# EAGLE board cansat (EAGLE 7.3.0)
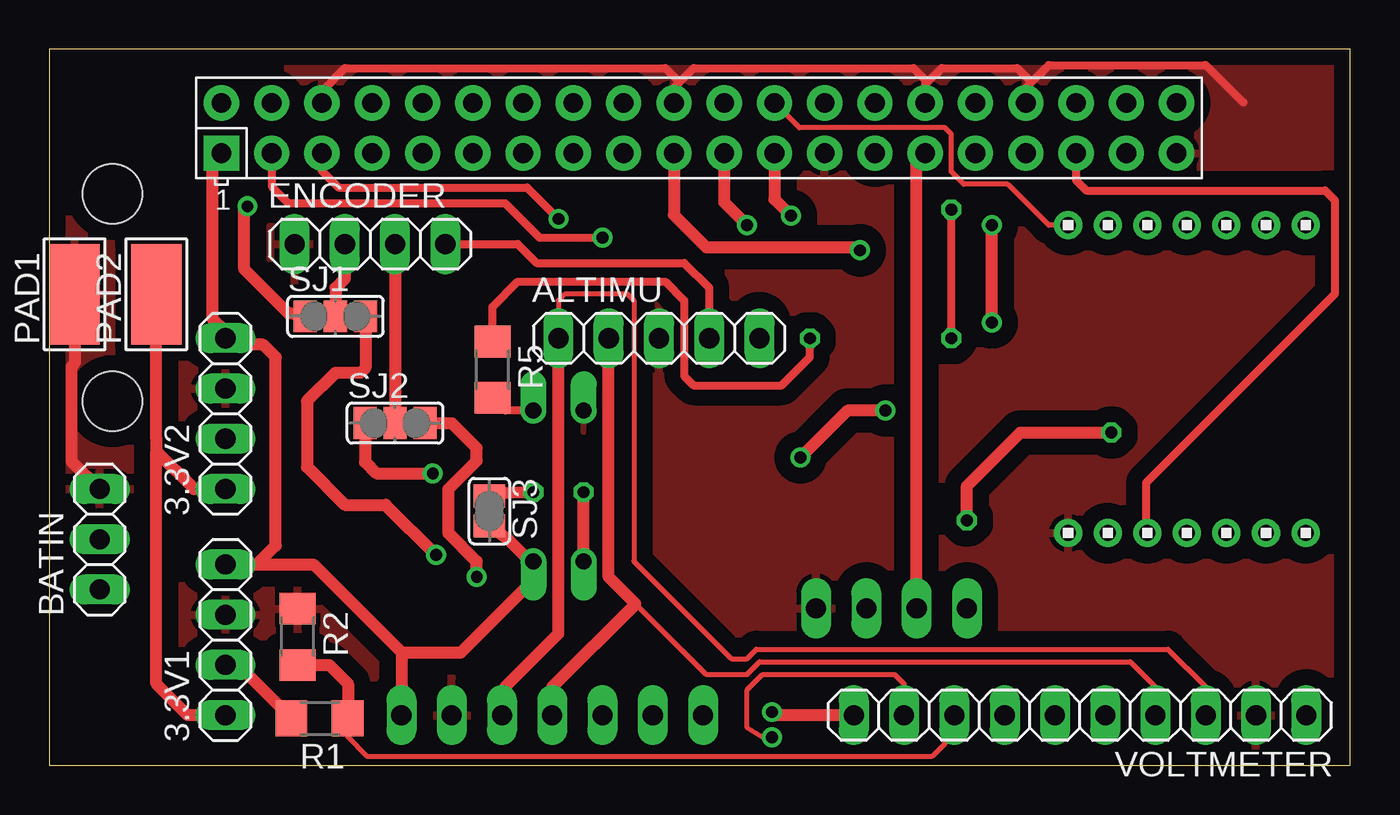
[diagram p0: board, top side]
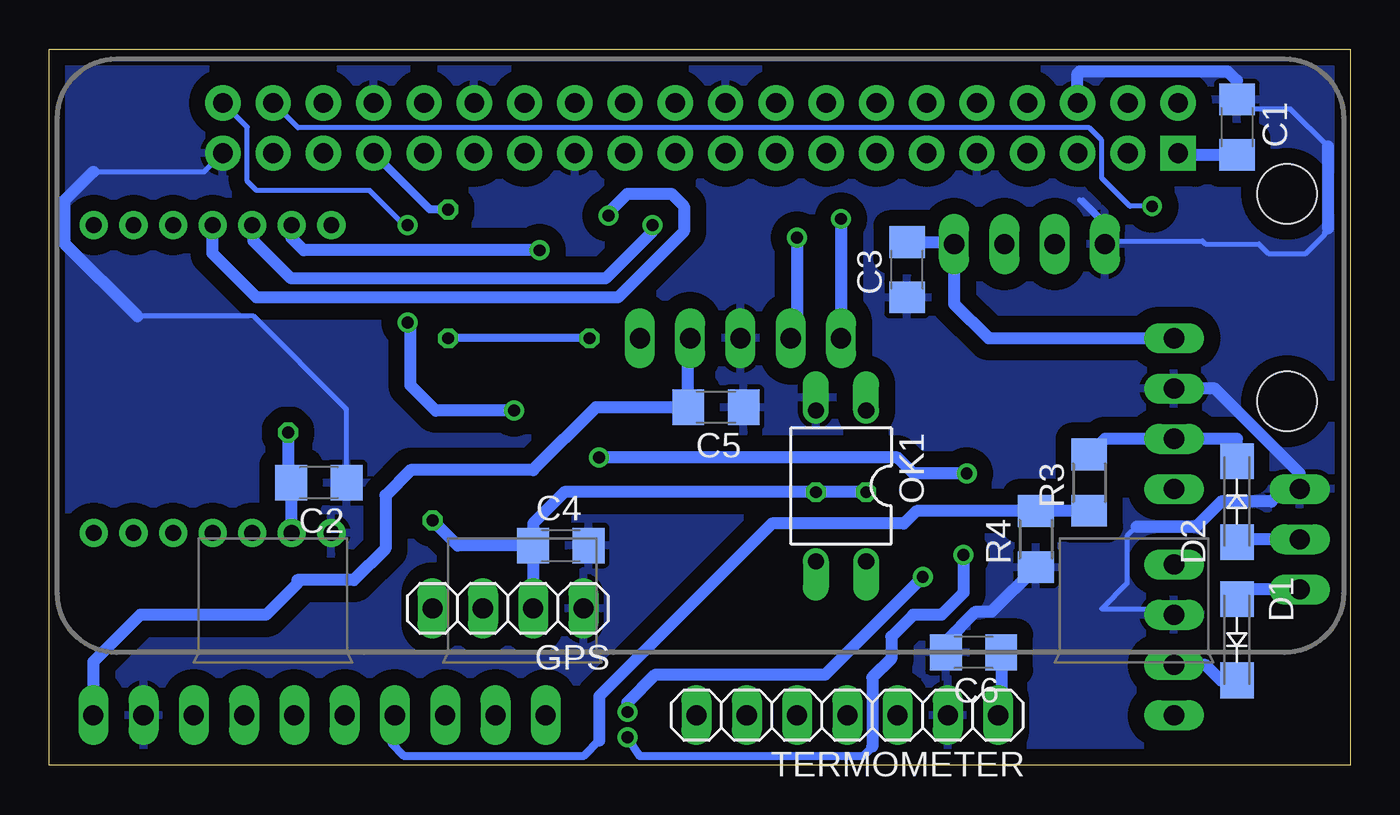
[diagram p1: board, bottom side, seen from below]

Size 65.71 x 36.19 mm. Coordinates in mm from the lower left corner, seen from the top.
Outline: 0,0 65.71,0 65.71,36.19 0,36.19 0,0
Copper layers (1*16): Top 0.035mm / dielectric 1.5mm / Bottom 0.035mm
Design rules "default *": minimum track width 10mil, minimum drill 19mil, track to track 8mil, track to pad 8mil, pad to pad 8mil, via to via 8mil, smd to smd 8mil, copper to edge 8mil, drill to drill 8mil, minimum pad ring 10mil, minimum via ring 8mil, stop-mask expansion 4mil, vias tented up to drill 0mil, thermal gap 10mil
Holes 3 mm at 3.17,18.41 3.17,28.89

## Footprints (pad centres in the part's own frame; a part is rotated, then mirrored left to right if it is on the bottom)
1X04 = drill 1.016 long: 1 -3.81,0; 2 -1.27,0; 3 1.27,0; 4 3.81,0
1X05 = drill 1.016 long: 1 -5.08,0; 2 -2.54,0; 3 0,0; 4 2.54,0; 5 5.08,0
1X03 = drill 1.016 long: 1 -2.54,0; 2 0,0; 3 2.54,0
C1206 = smd 1.6 x 1.8: 1 -1.4,0; 2 1.4,0
SMA-DO214AC = smd 1.8 x 1.7: A -2.05,0; K 2.05,0
DIL04 = drill 0.813 offset: 1 -1.27,-3.81; 2 1.27,-3.81; 3 1.27,3.81; 4 -1.27,3.81
5-2,5 = smd 2.54 x 5.08: 1 0,0
R1206 = smd 1.6 x 1.803: 1 -1.422,0; 2 1.422,0
1X7 = drill 0.8 pad 1.422: 1 -6,0; 2 -4,0; 3 -2,0; 4 0,0; 5 2,0; 6 4,0; 7 6,0
RASPBERRYPI_BASTELSTUBE_V13_RASPI_BOARD_B+_FULL = drill 1 pad 1.778 square: 1 8.37,25.23 | drill 1 pad 1.778: 2 8.37,27.77; 3 10.91,25.23; 4 10.91,27.77; 5 13.45,25.23; 6 13.45,27.77; 7 15.99,25.23; 8 15.99,27.77; 9 18.53,25.23; 10 18.53,27.77; 11 21.07,25.23; 12 21.07,27.77; 13 23.61,25.23; 14 23.61,27.77; 15 26.15,25.23; 16 26.15,27.77; 17 28.69,25.23; 18 28.69,27.77; 19 31.23,25.23; 20 31.23,27.77; 21 33.77,25.23; 22 33.77,27.77; 23 36.31,25.23; 24 36.31,27.77; 25 38.85,25.23; 26 38.85,27.77; 27 41.39,25.23; 28 41.39,27.77; 29 43.93,25.23; 30 43.93,27.77; 31 46.47,25.23; 32 46.47,27.77; 33 49.01,25.23; 34 49.01,27.77; 35 51.55,25.23; 36 51.55,27.77; 37 54.09,25.23; 38 54.09,27.77; 39 56.63,25.23; 40 56.63,27.77
SJ_2 = smd 1.168 x 1.6: 1 -1.524,0; 2 0,0; 3 1.524,0
SJ = smd 1.168 x 1.6: 1 -0.762,0; 2 0.762,0
1X07 = drill 1.016 long: 1 -7.62,0; 2 -5.08,0; 3 -2.54,0; 4 0,0; 5 2.54,0; 6 5.08,0; 7 7.62,0
1X10 = drill 1.016 long: 1 -11.43,0; 2 -8.89,0; 3 -6.35,0; 4 -3.81,0; 5 -1.27,0; 6 1.27,0; 7 3.81,0; 8 6.35,0; 9 8.89,0; 10 11.43,0

## Placement (x,y rotation side)
3.3V1  [1X04]  8.89,6.35 90 top
3.3V2  [1X04]  8.89,17.78 90 top
ALTIMU  [1X05]  30.8,21.59 0 top
BATIN  [1X03]  2.54,11.43 90 top
C1  [C1206]  5.71,32.26 270 bottom
C2  [C1206]  52.1,14.29 180 bottom
C3  [C1206]  22.38,25.05 90 bottom
C4  [C1206]  39.88,11.11 0 bottom
C5  [C1206]  32.04,18.1 180 bottom
C6  [C1206]  19.02,5.71 180 bottom
D1  GF1  [SMA-DO214AC]  5.71,6.35 270 bottom
D2  GF1  [SMA-DO214AC]  5.71,13.34 90 bottom
ENCODER  [1X04]  16.19,26.35 0 top
GPS  [1X04]  42.55,7.94 180 bottom
OK1  LTV816  [DIL04]  25.72,14.13 180 bottom
PAD1  [5-2,5]  1.27,23.81 0 top
PAD2  [5-2,5]  5.4,23.81 0 top
R1  10k  [R1206]  13.65,2.38 180 top
R2  10k  [R1206]  12.54,6.5 270 top
R3  10k  [R1206]  13.18,14.29 90 bottom
R4  10k  [R1206]  15.88,11.44 90 bottom
R5  400R  [R1206]  22.38,20 270 top
RADIOL  1X7  [1X7]  57.47,27.3 0 top
RADIOR  1X7  [1X7]  57.47,11.75 0 top
RASPIZERO  RPI-ZERO  [RASPBERRYPI_BASTELSTUBE_V13_RASPI_BOARD_B+_FULL]  0.32,5.71 0 top
SJ1  [SJ_2]  14.45,22.7 0 top
SJ2  [SJ_2]  17.46,17.3 0 top
SJ3  [SJ]  22.23,12.86 270 top
TERMOMETER  [1X07]  25.4,2.54 180 bottom
VOLTMETER  [1X10]  52.07,2.54 180 top

## Library data of the parts
3.3V1 3.3V2 ALTIMU BATIN ENCODER GPS TERMOMETER VOLTMETER = pinhead
C1-C6 = eagle-ltspice; SPICEMODEL: NONE; SPICEPREFIX: C
D1 D2 = diode
OK1 = optocoupler; OC_FARNELL: unknown; OC_NEWARK: unknown
PAD1 PAD2 = wirepad
R1-R5 = eagle-ltspice; SPICEMODEL: NONE; SPICEPREFIX: R
RADIOL RADIOR = headers(2mm)
RASPIZERO = RPI-Zero
SJ1-SJ3 = jumper

## Nets
3.3V: 3.3V1.4 3.3V2.4 ALTIMU.4 C1.2 C3.2 C5.2 C6.1 ENCODER.4 OK1.4 RASPIZERO.1 SJ3.2 TERMOMETER.1 VOLTMETER.1
BAT1+: 3.3V1.2 D1.K R1.2
BAT2+: 3.3V2.2 D2.K R3.2
ENCODER1: ENCODER.2 SJ1.2
ENCODER1_ADC: SJ1.3 VOLTMETER.9
ENCODER1_DIR: RASPIZERO.38 SJ1.1
ENCODER2: ENCODER.3 SJ2.2
ENCODER2_ADC: SJ2.3 VOLTMETER.10
ENCODER2_DIR: RASPIZERO.40 SJ2.1
EX1: R5.1 RASPIZERO.33
EX2: RASPIZERO.12
EX3: RASPIZERO.16
EX4: RASPIZERO.18
GND: 3.3V1.3 3.3V2.3 ALTIMU.3 BATIN.3 C1.1 C2.1 C3.1 C4.2 C5.1 C6.2 ENCODER.1 GPS.1 OK1.2 PAD1.1 R2.1 R4.1 RADIOR.1 RASPIZERO.6 RASPIZERO.9 RASPIZERO.20 RASPIZERO.25 RASPIZERO.30 RASPIZERO.34 RASPIZERO.39 TERMOMETER.2 VOLTMETER.2
GND@4: RASPIZERO.14
GPSTX: GPS.3 RASPIZERO.29
MISO: RADIOL.3 RASPIZERO.21
MOSI: RADIOL.2 RASPIZERO.19
N$1: R1.1 R2.2 VOLTMETER.8
N$2: OK1.1 R5.2
N$9: R3.1 R4.2 VOLTMETER.7
N$10: BATIN.1 D1.A
N$11: BATIN.2 D2.A
R_INT: RADIOR.3 RASPIZERO.35
RS: RADIOL.1 RASPIZERO.24
RX: RASPIZERO.10
SCL: ALTIMU.1 RASPIZERO.5 TERMOMETER.3 VOLTMETER.3
SCLK: RADIOL.4 RASPIZERO.23
SDA: ALTIMU.2 RASPIZERO.3 TERMOMETER.4 VOLTMETER.4
SHDN: 3.3V1.1 3.3V2.1 PAD2.1
SS: RASPIZERO.26
TX: RASPIZERO.8
VCC_OPTO: C2.2 C4.1 GPS.2 OK1.3 RADIOR.2 SJ3.1

## Tracks (layer width: path | path; a pad name or v marks a point on that pad's centre or on a via)
3.3V
  Top 0.406: ALTIMU.4 33.34,24.13 32.07,25.4 24.61,25.4 23.65,26.35 ENCODER.4
  Top 0.61: 3.3V1.4 10.48,10.16 | 10.48,10.16 11.43,11.11 11.43,20.64 10.79,21.27 9.21,21.27 3.3V2.4 8.89,21.91 8.26,22.54 8.26,30.51 RASPIZERO.1 | 10.48,10.16 13.34,10.16 17.78,5.71 | 17.78,5.71 TERMOMETER.1 | 17.78,5.71 20.8,5.71 24.45,9.37 OK1.4 24.29,10.32 23.18,11.43 SJ3.2
  Bottom 0.254: 20.1,26.45 ENCODER.4
  Bottom 0.406: 8.6,30.86 RASPIZERO.1
  Bottom 0.61: C1.2 8.6,30.86 | C6.1 17.62,2.7 TERMOMETER.1 | ALTIMU.4 33.44,21.49 C5.2 38.1,18.1 41.27,14.92 47.47,14.92 48.74,13.65 48.74,10.95 50.32,9.37 53.18,9.37 53.18,9.21 54.77,7.62 61.12,7.62 63.5,5.24 VOLTMETER.1 | C3.2 20.1,26.45 | ENCODER.4 20,23.34 18.26,21.59 3.3V2.4
BAT1+
  Top 0.61: 3.3V1.2 9.53,5.08 R1.2
  Bottom 0.61: D1.K 6.52,4.3 7.3,5.08 3.3V1.2
BAT2+
  Bottom 0.61: D2.K 5.71,16.51 3.3V2.2 12.38,16.51 R3.2
ENCODER1
  Top 0.61: ENCODER.2 14.92,24.61 14.45,24.13 SJ1.2
ENCODER1_ADC  (via drill 0.6)
  Top 0.254: v36.51,1.43 36.04,1.43 35.24,1.91 35.24,3.81 36.04,4.6 42.7,4.6 43.18,4.13 VOLTMETER.9
  Top 0.61: SJ1.3 15.97,20.1 15.72,19.84 14.45,19.84 13.02,18.41 13.02,15.08 14.92,13.18 16.99,13.18 v19.53,10.64
  Bottom 0.406: 24.13,0.95 24.61,0.48 35.88,0.48 v36.51,1.43
  Bottom 0.61: v19.53,10.64 19.53,8.73 20.64,7.62 22.07,7.62 23.18,6.51 23.18,5.4 24.13,4.45 24.13,0.95
ENCODER1_DIR  (via drill 0.6)
  Top 0.61: SJ1.1 12.06,22.86 9.84,25.08 9.84,28.1 v10,28.26
  Bottom 0.254: RASPIZERO.38 53.15,32.23 13.18,32.23 12.54,31.59 12.54,29.69 11.11,28.26 v10,28.26
ENCODER2
  Top 0.61: ENCODER.3 SJ2.2
ENCODER2_ADC  (via drill 0.6)
  Top 0.61: VOLTMETER.10 36.67,2.54 v36.51,2.7 | SJ2.3 20.32,17.3 21.59,16.03 21.59,15.4 20.16,13.97 20.16,11.75 21.59,10.32 v21.59,9.53
  Bottom 0.61: v36.51,2.7 36.51,3.17 35.08,4.6 26.51,4.6 v21.59,9.53
ENCODER2_DIR  (via drill 0.6)
  Top 0.61: SJ2.1 15.94,15.34 16.51,14.76 v19.37,14.76 | v47.62,22.38 v47.62,27.3 | v42.23,17.94 40.32,17.94 v37.94,15.56
  Bottom 0.254: RASPIZERO.40 55.72,32.26 55.72,29.53 55.24,29.05 49.53,29.05 47.78,27.3 v47.62,27.3
  Bottom 0.61: v42.23,17.94 46.2,17.94 47.47,19.21 47.47,22.23 v47.62,22.38 | v19.37,14.76 22.07,14.76 22.86,15.56 v37.94,15.56
EX1  (via drill 0.6)
  Top 0.406: R5.1 22.38,23.18 23.65,24.45 31.11,24.45 32.07,23.5 32.07,19.68 32.54,19.21 36.99,19.21 38.42,20.64 v38.42,21.59 | v45.56,21.59 v45.56,28.1
  Bottom 0.406: v38.42,21.59 v45.56,21.59 | v45.56,28.1 46.48,28.1 RASPIZERO.33
GND
  Top 0.406: RASPIZERO.34 49.33,34.25 49.61,34.53 | 49.61,34.53 50.48,35.4 58.42,35.4 60.33,33.5 | RASPIZERO.30 44.25,34.41 44.37,34.53 | 44.37,34.53 45.09,35.24 48.9,35.24 49.61,34.53 | RASPIZERO.20 31.55,34.25 31.83,34.53 | 31.83,34.53 32.54,35.24 43.66,35.24 44.37,34.53 | RASPIZERO.6 13.77,34.09 14.92,35.24 31.11,35.24 31.83,34.53
  Top 0.61: PAD1.1 1.27,20.32 1.11,20.16 1.11,15.4 BATIN.3
  Bottom 0.254: 2.54,14.76 BATIN.3 3.33,13.97 | 10.79,12.06 11.27,11.59 11.27,9.19 R2.1 10.15,7.92 9.84,7.62 3.3V1.3 | C2.1 50.7,18 55.4,22.7 61.28,22.7 | 63.5,30 57.89,30 RASPIZERO.39 | ENCODER.1 12.38,27.3 13.65,28.57 13.49,28.57 12.54,27.62 12.54,26.83 12.22,26.51 7.46,26.51 7.3,26.35 4.6,26.35 4.13,25.88 2.22,25.88 1.27,26.83 1.27,26.99 1.11,27.15 | 1.11,31.27 3.02,33.18 5.24,33.18 C1.1 | C6.2 20.42,6.25
  Bottom 0.406: C1.1 5.71,34.61 6.03,34.92
  Bottom 0.61: 2.54,14.76 6.83,19.05 3.3V2.3 | 3.33,13.97 3.97,13.34 6.51,13.34 7.78,12.06 10.79,12.06 | 61.28,22.7 64.93,26.35 64.93,28.57 63.5,30 | 1.11,27.15 1.11,31.27 | 20.42,6.25 18.89,7.78 18.11,7.78 R4.1 | RASPIZERO.6 13.77,34.97 13.65,35.08 6.19,35.08 5.71,34.61
  pour Bottom (isolate 0.813): -1.27,37.78 -1.59,37.78 -1.59,-1.91 67.31,-1.91 67.31,37.78
  pour Top (isolate 0.813): -2.22,38.42 -4.13,38.42 -4.13,-4.45 68.9,-4.45 68.9,39.37 27.62,39.37 27.62,40.01
GPSTX
  Top 0.61: GPS.3 43.81,30.51 RASPIZERO.29
MISO  (via drill 0.6)
  Top 0.61: RASPIZERO.21 34.09,28.46 v35.24,27.3
  Bottom 0.254: 55.4,27.24 RADIOL.3
  Bottom 0.61: v35.24,27.3 35.24,26.99 37.62,24.61 53.5,24.61 55.4,26.51 55.4,27.24
MOSI  (via drill 0.6)
  Top 0.61: RASPIZERO.19 31.55,27.82 33.18,26.19 40.8,26.19 v40.96,26.04
  Bottom 0.254: 53.5,26.67 53.5,27.27 RADIOL.2
  Bottom 0.61: v40.96,26.04 52.86,26.04 53.5,26.67
N$1
  Top 0.254: 15.08,2.4 R1.1 15.07,1.44 16.03,0.48 44.61,0.48 45.88,1.75 45.88,2.38 VOLTMETER.8
  Top 0.61: R2.2 14.13,5.08 15.08,4.13 15.08,2.4
N$2
  Top 0.406: OK1.1 23.03,17.94 R5.2
N$9
  Bottom 0.254: 15.86,12.87 R4.2
  Bottom 0.406: 37.94,1.27 38.73,0.48 47.78,0.48 48.42,1.11 48.42,2.38
  Bottom 0.61: R3.1 15.86,12.87 | 37.94,1.27 37.94,3.49 29.21,12.22 22.54,12.22 21.91,12.86 R4.2 | 48.42,2.38 VOLTMETER.7
N$10
  Bottom 0.406: 5.71,8.89 D1.A
  Bottom 0.61: BATIN.1 5.71,8.89
N$11
  Bottom 0.406: 5.71,11.43 D2.A
  Bottom 0.61: BATIN.2 5.71,11.43
R_INT
  Top 0.406: RASPIZERO.35 51.87,29.57 52.39,29.05 64.45,29.05 64.93,28.57 64.93,23.81 55.4,14.29 55.4,11.81 RADIOR.3
RS
  Top 0.254: RASPIZERO.24 37.89,32.23 45.24,32.23 45.56,31.91 45.56,30 46.2,29.37 48.42,29.37 50.48,27.3 RADIOL.1
SCL  (via drill 0.6)
  Top 0.254: VOLTMETER.3 58.42,3.97 56.52,5.87 35.72,5.87 35.24,5.4 34.45,5.4 29.53,10.32 29.53,23.5 29.21,23.81 26.04,23.81 25.72,23.5 ALTIMU.1
  Top 0.406: RASPIZERO.5 13.77,30.05 14.61,29.21 24.13,29.21 v25.72,27.62
  Top 0.61: ALTIMU.1 25.72,6.67 23.02,3.97 23.02,2.7 TERMOMETER.3
  Bottom 0.61: v25.72,27.62 ALTIMU.1
SCLK  (via drill 0.6)
  Top 0.61: RASPIZERO.23 36.63,28.62 v37.47,27.78
  Bottom 0.254: v37.47,27.78 37.47,27.94
  Bottom 0.61: 37.47,27.94 36.51,28.89 34.29,28.89 33.66,28.26 33.66,26.99 36.99,23.65 55.24,23.65 57.47,25.88 RADIOL.4
SDA  (via drill 0.6)
  Top 0.254: VOLTMETER.4 55.88,3.97 54.61,5.24 35.88,5.24 35.24,4.6 33.18,4.6 29.61,8.18
  Top 0.406: v27.94,26.67 24.77,26.67 23.02,28.42 12.06,28.42 11.23,29.25 RASPIZERO.3
  Top 0.61: ALTIMU.2 28.26,9.53 29.61,8.18 25.4,3.97 TERMOMETER.4
  Bottom 0.61: v27.94,26.67 27.94,21.91 ALTIMU.2
SHDN
  Top 0.406: 3.3V2.1 7.3,13.97
  Top 0.61: 7.3,13.97 5.4,15.88 | 5.4,15.88 5.4,16.51 PAD2.1 | 3.3V1.1 6.99,2.54 5.4,4.13 5.4,15.88
VCC_OPTO  (via drill 0.6)
  Top 0.61: v46.35,12.38 46.35,14.13 49.05,16.83 v53.66,16.83 | SJ3.1 22.19,13.78 v24.45,13.81 | OK1.3 v26.99,13.81
  Bottom 0.61: C4.1 41.27,12.22 39.69,13.81 v26.99,13.81 v24.45,13.81 | C4.1 GPS.2 | RADIOR.2 53.47,14.26 C2.2 53.66,14.45 v53.66,16.83 | C4.1 45.09,11.11 v46.35,12.38